# EAGLE board OSO-MISC-21-009 Simple Thermistor Board (EAGLE 9.6.2)
REV: D
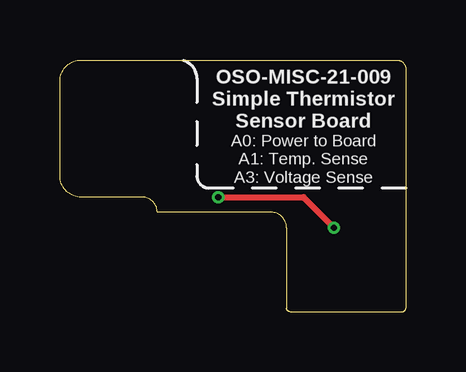
[diagram p0: board, top side]
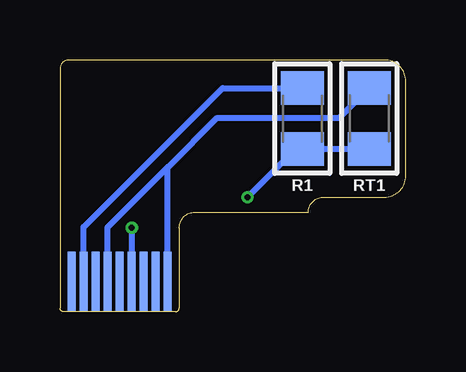
[diagram p1: board, bottom side, seen from below]

Size 14.43 x 10.48 mm. Coordinates in mm from the lower left corner, seen from the top.
Outline: 9.45,3.5 arc90 8.81,4.14 4.06,4.14 arc90 3.43,4.77 0.89,4.77 arc-90 0,5.66 0,9.6 arc-90 0.89,10.48 14.05,10.48 arc-90 14.43,10.1 14.43,3.5
Copper layers (1*16): Top 0.035559375mm / dielectric 4mil / Bottom 0.035559375mm
Design rules "oshpark-2layer *": minimum track width 6mil, minimum drill 10mil, track to track 6mil, track to pad 6mil, pad to pad 6mil, via to via 6mil, smd to smd 6mil, copper to edge 15mil, drill to drill 6mil, minimum pad ring 5mil, minimum via ring 5mil, stop-mask expansion 2.5mil, vias tented up to drill 12mil, thermal gap 10mil
Net classes: 0 default: width 0.203 mm; 1 power: width 0.203 mm; 2 gnd: width 0.203 mm

## Footprints (pad centres in the part's own frame; a part is rotated, then mirrored left to right if it is on the bottom)
_1206 = smd 1.4 x 1.8: 1 -1.27,0; 2 1.27,0
FH19C9S05SH10-FFC = smd 0.347 x 2.5 bottom: 1 2,-2.25; 2 1.5,-2.25; 3 1,-2.25; 4 0.5,-2.25; 5 0,-2.25; 6 -0.5,-2.25; 7 -1,-2.25; 8 -1.5,-2.25; 9 -2,-2.25

## Placement (x,y rotation side)
R1  1% 10K  [_1206]  4.32,8.05 90 bottom
RT1  NTC 10K  [_1206]  1.52,8.05 270 bottom
U$3  FH19C-9S-0.5SH_10-FFC  [FH19C9S05SH10-FFC]  11.94,3.5 0 top

## Library data of the parts
R1 RT1 = microbuilder
U$3 = FH19C-9S-0.5SH

## Nets
3.3V [power]: U$3.1
BOARD_POWER: RT1.1 U$3.4 U$3.9
GND [gnd]: R1.2 U$3.2
SCL: U$3.8
SDA: U$3.7
TSENSE: R1.1 RT1.2 U$3.6

## Tracks (layer width: path | path; a pad name or v marks a point on that pad's centre or on a via)
BOARD_POWER
  Bottom 0.254: RT1.1 2.77,8.07 7.87,8.07 9.91,6.04 9.94,6.01 | U$3.4 12.44,3.51 9.94,6.01 | U$3.9 9.94,6.01
GND
  Bottom 0.254: U$3.2 13.44,3.52 7.65,9.32 R1.2
TSENSE  (via drill 0.25)
  Top 0.254: v6.6,4.77 10.16,4.77 v11.43,3.5
  Bottom 0.254: RT1.2 R1.1 4.6,6.78 v6.6,4.77 | v11.43,3.5 U$3.6

## Text on the board
tPlace: OSO-MISC-21-009 / Simple Thermistor / Sensor Board | A0: Power to Board / A1: Temp. Sense / A3: Voltage Sense